# Altium PCB CCP_PCB2.PcbDoc
Units mil, origin at the board's own origin, x right, y up, seen from the top; angles counter-clockwise.
Board outline 5800 x 4575 mil, 2 copper layers (Top Layer, Bottom Layer); 66 components, 54 nets, 270 pads, 27 vias.
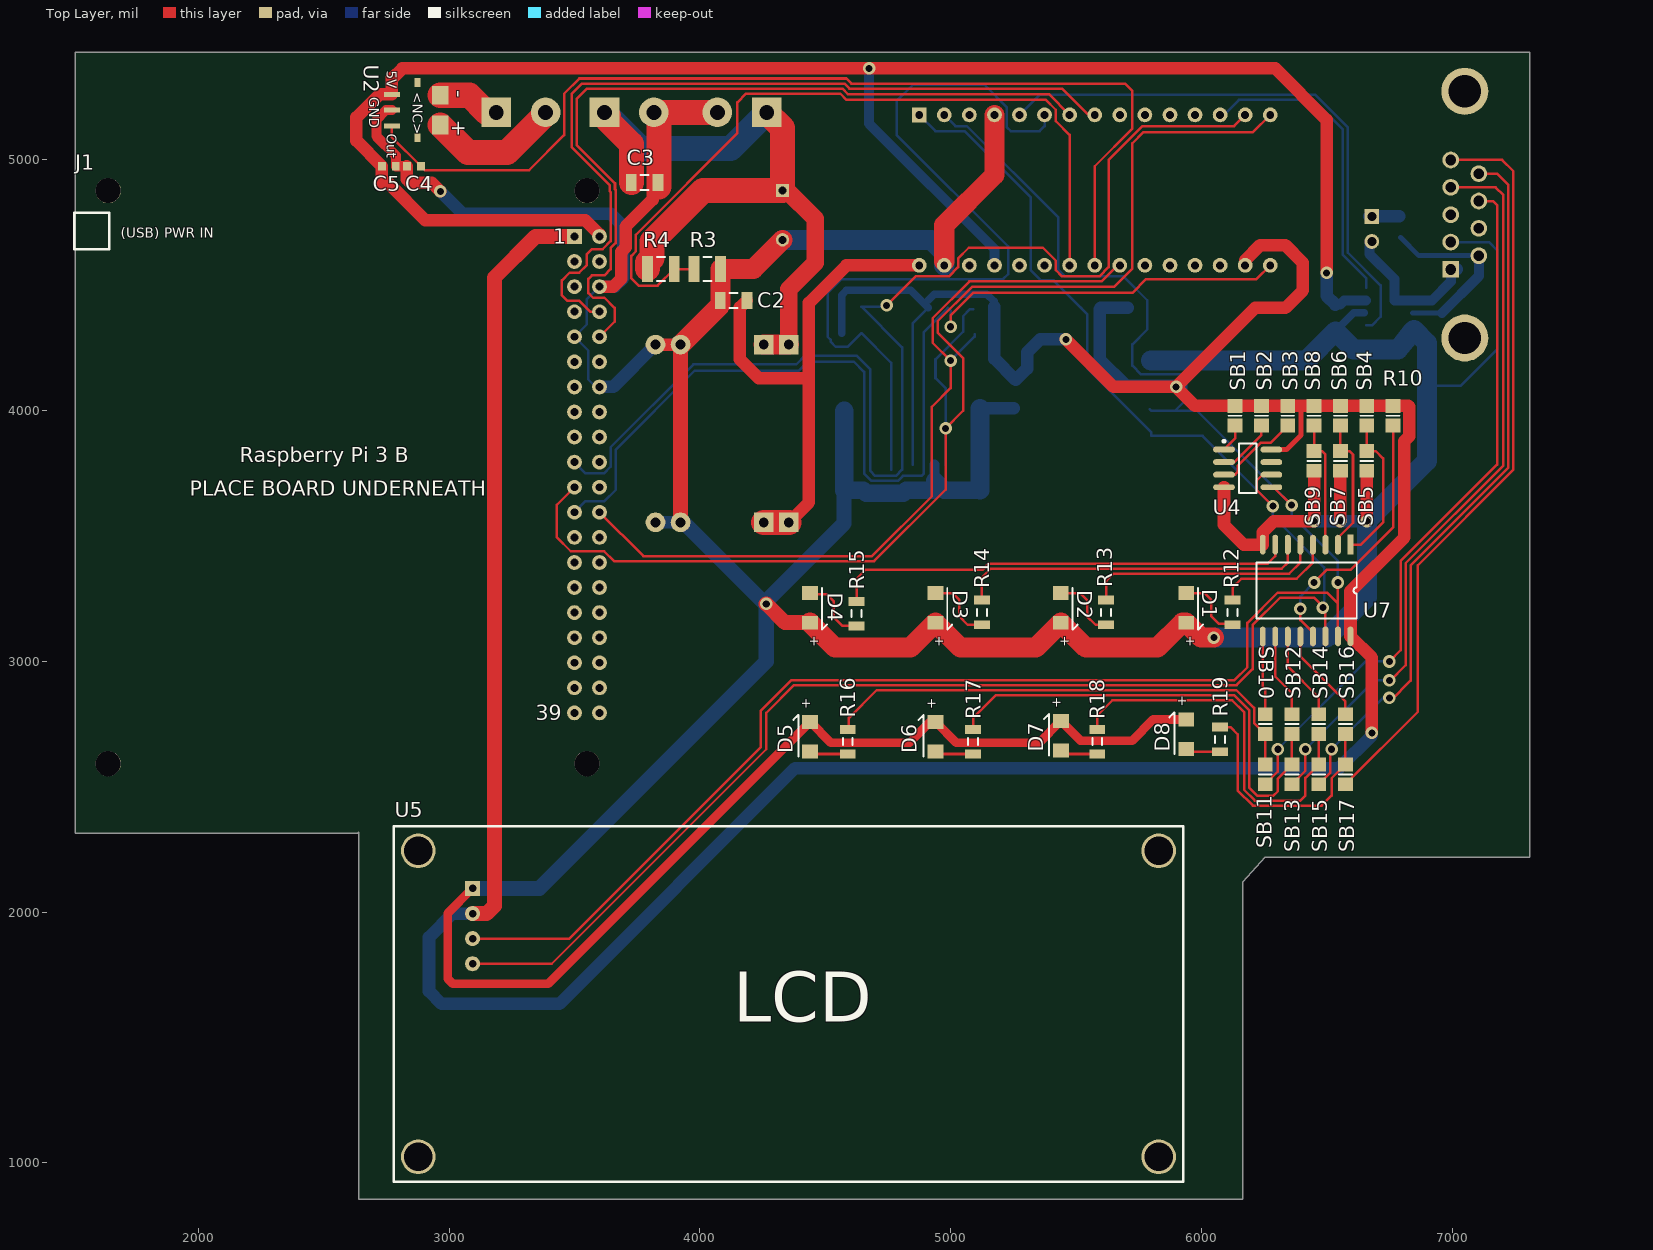
[diagram p0: Top Layer view]
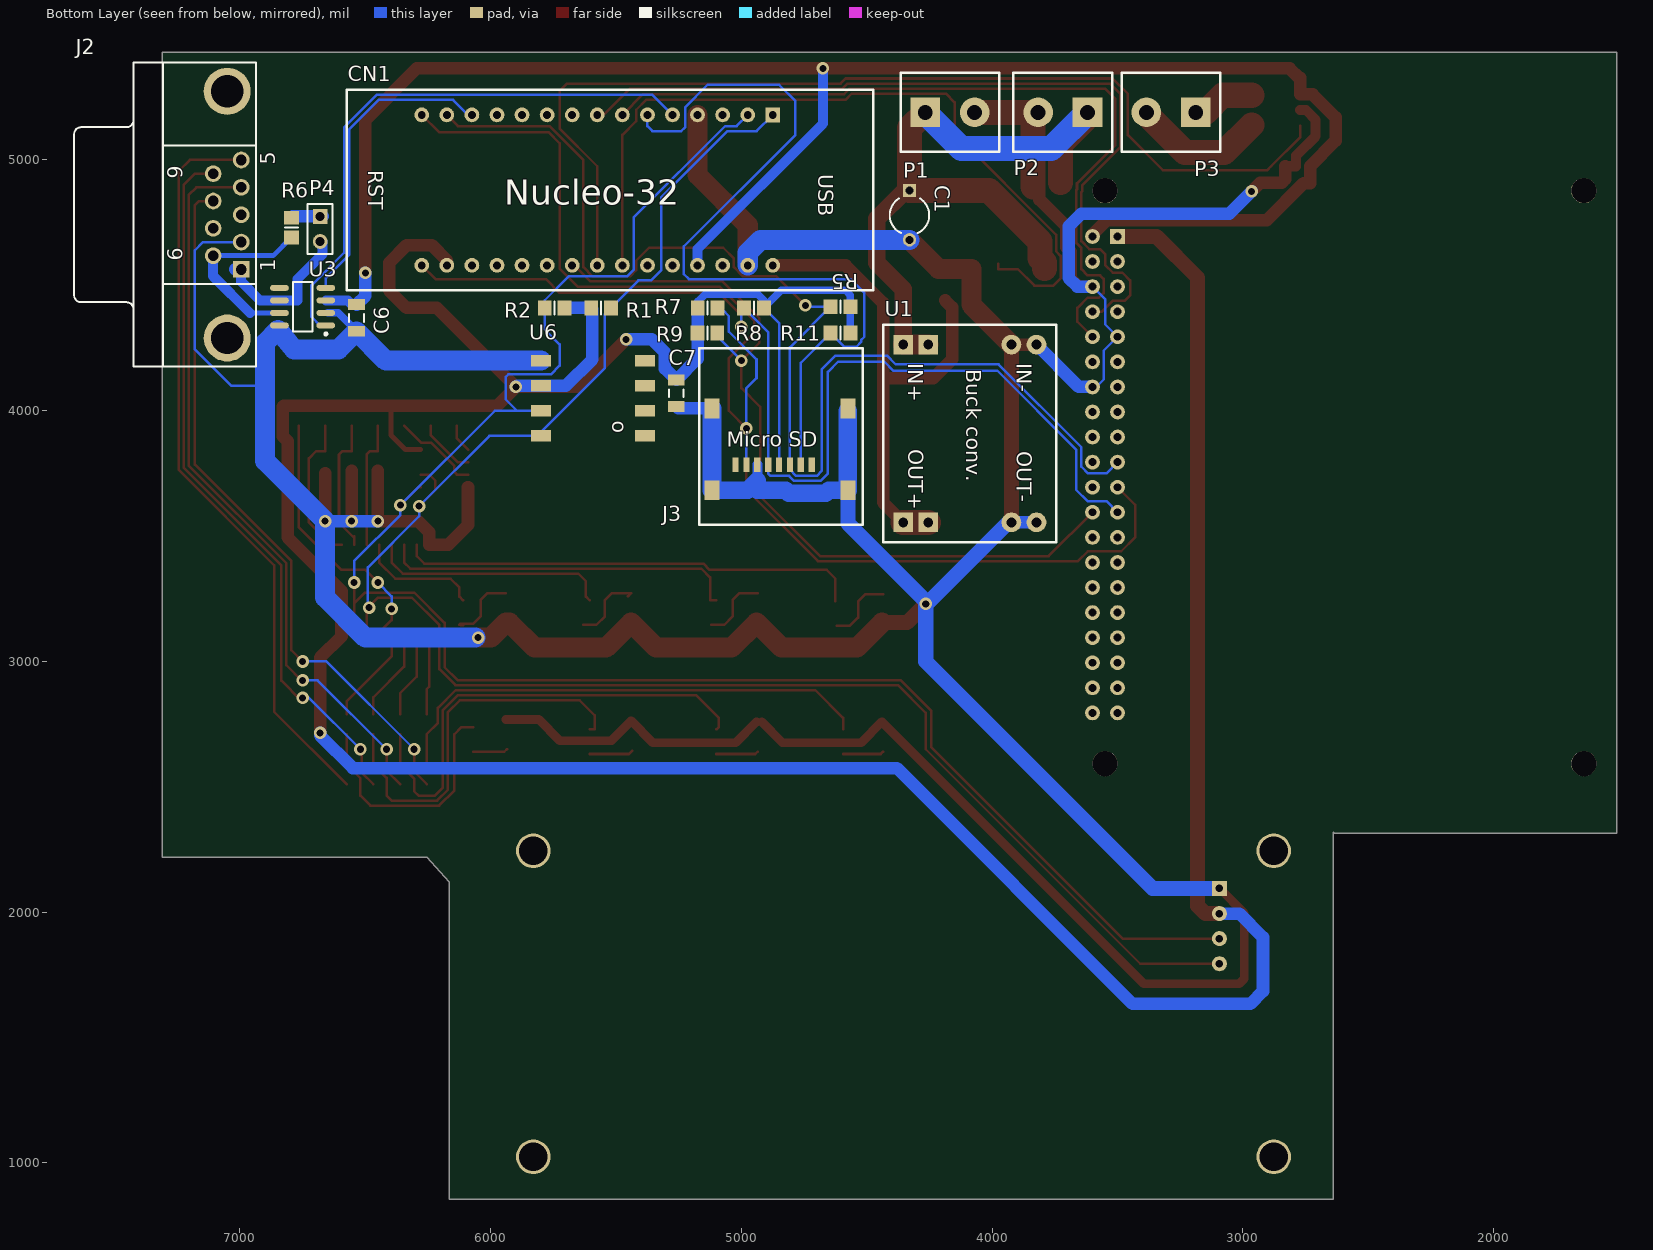
[diagram p1: Bottom Layer view, seen from below]

## Layer stack, top to bottom
Top Solder: solder mask 0.4, Solder Resist, Dk 3.5
Top Layer: signal copper 1.4
Dielectric 1: dielectric 12.6, FR-4, Dk 4.8
Bottom Layer: signal copper 1.4
Bottom Solder: solder mask 0.4, Solder Resist, Dk 3.5

## Board outline
6165,855 6165,2120 6255,2220 7310,2220 7310,5430 1510,5430 1510,2315 2635,2315 2640,2320 2640,855

## Design rules (kind name [scope] priority, off if disabled: settings)
Clearance [All] p1: gap=10 ignorepadtopadclearanceinfootprint=FALSE except(0: Arc-Hole Track-Hole SMDPad-Hole THPad-Hole Via-Hole Fill-Hole Poly-Hole Region-Hole Text-Hole)
PolygonConnect [All] p1: connectstyle=Relief reliefconductorwidth=10 reliefentries=4 polygonreliefangle="90 Angle" airgapwidth=10
RoutingVias [All] p1: holewidth=28 width=50 viastyle="Through Hole" minholewidth=28 minwidth=50 maxholewidth=28 maxwidth=50
SolderMaskExpansion [All] p1: expansion=4
Width [All] p1: maxlimit=200 minlimit=10 preferedwidth=10 minimp=50.000000 maximp=50.000000 favimp=50.000000
30 further rules are at their usual default settings.

## Classes and differential pairs
component class CCP_MCU: C1 C2 C3 C4 C5 C6 CN1 J1 J2 P1 P2 P3 P4 R1 R2 R3 R4 R5 R6 R7 R8 R9 SB1 SB2 SB3 U1 U2 U3 U4
component class CCP_IO: C7 D1 D2 D3 D4 D5 D6 D7 D8 J3 R10 R11 R12 R13 R14 R15 R16 R17 R18 R19 SB4 SB5 SB6 SB7 SB8 SB9 SB10 SB11 SB12 SB13 SB14 SB15 SB16 SB17 U5 U6 U7

## Components (designator, comment, footprint, x,y, rotation, side; value= is the part's Value field where it differs from the comment)
C1 "Cap" CAPR5-4X5 4330,4780 r270 bottom value=220uF
C2 "Cap" C1206 4135,4440 r0 top value=10uF
C3 "Cap" C1206 3780,4910 r180 top value=10uF
C4 "Cap Semi" 1608[0603] 2860,4975 r0 top value=100pF
C5 "Cap Semi" 1608[0603] 2760,4975 r0 top value=.1uF
C6 "Cap" C1206 6535,4370 r90 bottom value=10uF
C7 "Cap" C1206 5260,4070 r90 bottom value=10uF
CN1 "NUCLEO-L432KC" NUCLEO-32 4875,5180 r270 bottom
D1 "LED1" "1206 LED" 5939.63,3213.9 r270 top
D2 "LED1" "1206 LED" 5439.63,3213.9 r270 top
D3 "LED1" "1206 LED" 4939.63,3213.9 r270 top
D4 "LED1" "1206 LED" 4439.63,3213.9 r270 top
D5 "LED1" "1206 LED" 4440,2700 r90 top
D6 "LED1" "1206 LED" 4940,2700 r90 top
D7 "LED1" "1206 LED" 5440,2704.06 r90 top
D8 "LED1" "1206 LED" 5940,2710 r90 top
J1 "Raspberry Pi" "RASPBERRY PI" 3500,4695 r0 top
J2 "D Connector 9" DSUB1.385-2H9 7424.92,4781.89 r90 bottom
J3 "uSD" MICRO_SD_HOLDER 5023.23,3785 r180 bottom
P1 "V_BATT" "2POS TERM BLOCK" 4266.85,5190 r180 bottom
P2 "NAP" "2POS TERM BLOCK" 3620,5190 r0 bottom
P3 "Header 2H" "2POS TERM BLOCK" 3188.15,5190 r0 bottom
P4 "TERM" HDR1X2 6680,4775 r270 bottom
R1 "Res1" 6-0805_M 5560,4410 r0 bottom value=1K
R2 "Res1" 6-0805_M 5745,4410 r180 bottom value=1K
R3 "SMD 1210" 14-1210 4030,4565 r0 top value=1K
R4 "SMD 1210" 14-1210 3845,4565 r0 top value=4.5K
R5 "Res1" 6-0805_M 4605,4415 r0 bottom value=47K
R6 "Res1" 6-0805_M 6795,4730 r270 bottom value=120
R7 "Res1" 6-0805_M 5135,4410 r180 bottom value=47K
R8 "Res1" 6-0805_M 4950,4410 r0 bottom value=47K
R9 "Res1" 6-0805_M 5135.63,4310 r0 bottom value=47K
R10 "Res1" 6-0805_M 6765,3980 r90 top value=10K
R11 "Res1" 6-0805_M 4605,4310 r0 bottom value=10K
R12 "Res1" 1206 6125,3146.57 r90 top value=1K
R13 "Res1" 1206 5620,3146.57 r90 top value=1K
R14 "Res1" 1206 5125,3146.57 r90 top value=1K
R15 "Res1" 1206 4625,3141.57 r90 top value=1K
R16 "Res1" 1206 4590,2631.1 r90 top value=1K
R17 "Res1" 1206 5090,2631.1 r90 top value=1K
R18 "Res1" 1206 5585,2631.1 r90 top value=1K
R19 "Res1" 1206 6075,2640 r90 top value=1K
SB1 "Res1" 6-0805_M 6135,3980 r90 top value=0
SB2 "Res1" 6-0805_M 6240,3980 r90 top value=0
SB3 "Res1" 6-0805_M 6345,3980 r90 top value=0
SB4 "Res1" 6-0805_M 6660,3980 r90 top value=0
SB5 "Res1" 6-0805_M 6660,3800 r90 top value=0
SB6 "Res1" 6-0805_M 6555,3980 r90 top value=0
SB7 "Res1" 6-0805_M 6555,3800 r90 top value=0
SB8 "Res1" 6-0805_M 6450,3980 r90 top value=0
SB9 "Res1" 6-0805_M 6450,3800 r90 top value=0
SB10 "Res1" 6-0805_M 6255,2750 r90 top value=0
SB11 "Res1" 6-0805_M 6255,2550 r90 top value=0
SB12 "Res1" 6-0805_M 6361.67,2750 r90 top value=0
SB13 "Res1" 6-0805_M 6361.67,2550 r90 top value=0
SB14 "Res1" 6-0805_M 6468.33,2750 r90 top value=0
SB15 "Res1" 6-0805_M 6468.33,2550 r90 top value=0
SB16 "Res1" 6-0805_M 6575,2750 r90 top value=0
SB17 "Res1" 6-0805_M 6575,2550 r90 top value=0
U1 "MP1584EN Breakout Board" "MP1584EN Breakout" 3823.5,4263.66 r270 bottom
U2 "ACS780xLR" "7-pin PSOF" 2874.45,5199.06 r270 top
U3 "MCP2561" SO8_L 6750,4415 r0 bottom
U4 "CAT24C32" SO8_N 6185,3770 r0 top
U5 "16x2 Char. LCD" B01LC8HZ2O 2877.24,2245 r0 top
U6 "SSCMNNN030PA2A3" 8-SMT 5385,4200 r270 bottom
U7 "PCF8574" 16-SOIC 6595,3466.14 r270 top

## Footprints (in the part's own frame and the unit in brackets; to place one, negate y for a bottom-side part, rotate by r counter-clockwise, add the part's x,y. Pads: shape width x height; smd on the part's side, far side on the other; paste and mask are expansions set on the pad)
"2POS TERM BLOCK" [mm] "5mm Pitch"
  rect 3x3 hole 1.5: 1(0,0)
  round 3 hole 1.5: 2(5,0)
  silkscreen extent -2.5,-4 7.5,4, body extent -2.51,-4.57 8.09,4.43, height 12.6
6-0805_M [mm] "Chip Resistor, Body 2.0x1.2mm, IPC Low Density"
  rect 1.4x1.5 smd: 1(-1,0) 2(1,0)
  silkscreen extent 0,-0.65 0,0.65, body extent -1.07,-0.7 1.07,0.7, height 0.7
"7-pin PSOF" [mm] "ACS780xLR"
  rect 0.5x1.6 smd: 1(-1.6,-2.6) 2(0,-2.6) 3(1.6,-2.6)
  rect 0.9x0.6 smd: 4(2.8,0) 7(-2.8,0)
  rect 1.9x1.7 smd: 5(1.5,2.3) 6(-1.5,2.3)
8-SMT [mm]
  rect 1.15x2.04 smd: 1(0,-10.54) 2(2.54,-10.54) 3(5.08,-10.54) 4(7.62,-10.54) 5(7.62,0) 6(5.08,0) 7(2.54,0) 8(0,0)
  body extent -1.35,-12 8.55,1.46, height 5.44
14-1210 [mm] "Chip Resistor, Body 3.2x2.5mm, IPC High Density"
  rect 1.1x2.6 smd: 1(-1.35,0) 2(1.35,0)
  silkscreen extent -0.4,-1.2 0.4,1.2, body extent -1.68,-1.32 1.68,1.32, height 0.9
16-SOIC [mm]
  rect 2x0.6 smd: 1(0,0)
  oval 2x0.6 smd: 2(0,-1.27) 3(0,-2.54) 4(0,-3.81) 5(0,-5.08) 6(0,-6.35) 7(0,-7.62) 8(0,-8.89) 9(9.3,-8.89) 10(9.3,-7.62) 11(9.3,-6.35) 12(9.3,-5.08) 13(9.3,-3.81) 14(9.3,-2.54) 15(9.3,-1.27) 16(9.3,0)
  silkscreen extent 1.84,-9.53 7.46,0.64
1206 [mm] "1206 SMD Resistor"
  rect 0.9x1.6 smd: 1(0,0) 2(2.5,0)
  silkscreen extent 0.9,-0.5 1.6,0.5
"1206 LED" [mm]
  rect 1.4x1.6 smd: 1(-1.5,0) 2(1.5,0)
  silkscreen extent -2,1.2 2.2,1.7, body extent -1.4,-0.8 1.5,0.8, height 1
1608[0603] [mm] "Chip Capacitor, Body 1.6x0.8mm, IPC High Density"
  rect 0.8x0.9 smd: 1(-0.7,0) 2(0.7,0)
  body extent -0.87,-0.48 0.87,0.48, height 1.3
B01LC8HZ2O [mm] "LCD 16x2 Characters"
  rect 1.524x1.524 hole 0.762: 1(5.5,-3.81)
  round 1.524 hole 0.762: 2(5.5,-6.36) 3(5.5,-8.9) 4(5.5,-11.44)
  round 3.5 hole 2.9: H(0,-31) H(0,0) H(75,-31) H(75,0)
  silkscreen extent -2.5,-33.5 77.5,2.5
C1206 [mm] "Chip Capacitor, Body 3.2x1.6mm, IPC High Density"
  rect 1.1x1.7 smd: 1(-1.35,0) 2(1.35,0)
  silkscreen extent -0.4,-0.75 0.4,0.75, body extent -1.7,-0.9 1.7,0.9, height 1.3
CAPR5-4X5 [mm] "Capacitor; 2 Leads"
  rect 1.35x1.35 hole 0.8: 1(-2.5,0)
  round 1.35 hole 0.8: 2(2.5,0)
  silkscreen extent -1.69,-2 1.82,2
DSUB1.385-2H9 [mm] "Connector; D Subminiature; 9 Position; Right Angle; Pitch 1.385 mm"
  rect 1.69x1.69 hole 1.09: 1(-5.54,-10.92)
  round 1.69 hole 1.09: 2(-2.77,-10.92) 3(0,-10.92) 4(2.77,-10.92) 5(5.54,-10.92) 6(-4.155,-8.08) 7(-1.385,-8.08) 8(1.385,-8.08) 9(4.155,-8.08)
  round 4.76 hole 3.26: 10(-12.495,-9.5) 11(12.495,-9.5)
  silkscreen extent -15.4,-12.4 15.4,6
HDR1X2 [mm] "Connector; Header; 2 Position"
  rect 1.5x1.5 hole 0.9: 1(0,0)
  round 1.5 hole 0.9: 2(2.54,0)
  silkscreen extent -1.27,-1.27 3.81,1.27
MICRO_SD_HOLDER [mm]
  rect 0.63x1.5 smd: 1(7.7,0) 2(6.6,0) 3(5.5,0) 4(4.4,0) 5(3.3,0) 6(2.2,0) 7(1.1,0) 8(0,0)
  rect 1.5x2 smd: 9(-2.38,-2.6) 9(-2.38,5.7) 9(11.37,-2.6) 9(11.37,5.7)
  silkscreen extent -3.7,-6.1 12.9,11.8
"MP1584EN Breakout" [mm] "Buck Converter"
  round 2 hole 1: 0(0,-2.54) 0(0,0) 2(18,-2.54) 2(18,0)
  rect 2x2 hole 1: 1(0,-13.5) 1(0,-10.96) 3(18,-13.5) 3(18,-10.96)
  silkscreen extent -2,-15.5 20,2
NUCLEO-32 [mm]
  rect 1.5x1.5 hole 0.8: 1(0,0)
  round 1.5 hole 0.8: 2(0,-2.54) 3(0,-5.08) 4(0,-7.62) 5(0,-10.16) 6(0,-12.7) 7(0,-15.24) 8(0,-17.78) 9(0,-20.32) 10(0,-22.86) 11(0,-25.4) 12(0,-27.94) 13(0,-30.48) 14(0,-33.02) 15(0,-35.56) 16(15.24,-35.56) 17(15.24,-33.02) 18(15.24,-30.48) 19(15.24,-27.94) 20(15.24,-25.4) 21(15.24,-22.86) 22(15.24,-20.32) 23(15.24,-17.78) 24(15.24,-15.24) 25(15.24,-12.7) 26(15.24,-10.16) 27(15.24,-7.62) 28(15.24,-5.08) 29(15.24,-2.54) 30(15.24,0)
  silkscreen extent -2.54,-43.18 17.78,10.16, body extent -1.67,-40.6 16.87,9.69, height 5
"RASPBERRY PI" [mm] "2x20 Header with mounting holes"
  rect 1.5x1.5 hole 0.8: 1(0,0)
  round 1.5 hole 0.8: 2(2.54,0) 3(0,-2.54) 4(2.54,-2.54) 5(0,-5.08) 6(2.54,-5.08) 7(0,-7.62) 8(2.54,-7.62) 9(0,-10.16) 10(2.54,-10.16) 11(0,-12.7) 12(2.54,-12.7) 13(0,-15.24) 14(2.54,-15.24) 15(0,-17.78) 16(2.54,-17.78) 17(0,-20.32) 18(2.54,-20.32) 19(0,-22.86) 20(2.54,-22.86) 21(0,-25.4) 22(2.54,-25.4) 23(0,-27.94) 24(2.54,-27.94) 25(0,-30.48) 26(2.54,-30.48) 27(0,-33.02) 28(2.54,-33.02) 29(0,-35.56) 30(2.54,-35.56) 31(0,-38.1) 32(2.54,-38.1) 33(0,-40.64) 34(2.54,-40.64) 35(0,-43.18) 36(2.54,-43.18) 37(0,-45.72) 38(2.54,-45.72) 39(0,-48.26) 40(2.54,-48.26)
  round 2.54 hole 2.54 unplated: H(-47.23,-53.41) H(-47.23,4.64) H(1.27,-53.41) H(1.27,4.64)
  silkscreen extent -50.67,-1.27 -47.12,2.41
SO8_L [mm] "SOIC, 8-Leads, Body 4.9x3.9mm, Pitch 1.27mm, IPC High Density"
  oval 1.9x0.6 smd: 1(-2.35,1.905) 2(-2.35,0.635) 3(-2.35,-0.635) 4(-2.35,-1.905) 5(2.35,-1.905) 6(2.35,-0.635) 7(2.35,0.635) 8(2.35,1.905)
  silkscreen extent -2.47,-2.5 1,2.88, body extent -2,-2.5 2,2.5, height 1.75
SO8_N [mm] "SOIC, 8-Leads, Body 4.9x3.9mm, Pitch 1.27mm, IPC Medium Density"
  oval 2.2x0.6 smd: 1(-2.4,1.905) 2(-2.4,0.635) 3(-2.4,-0.635) 4(-2.4,-1.905) 5(2.4,-1.905) 6(2.4,-0.635) 7(2.4,0.635) 8(2.4,1.905)
  silkscreen extent -2.52,-2.5 0.9,2.88, body extent -2,-2.5 2,2.5, height 1.75

## Part data
C1 C2 C3 C6 C7: "Capacitor", LatestRevisionDate=17-Jul-2002, LatestRevisionNote="Re-released for DXP Platform.", PackageDescription="Radial Cap, Thru-Hole; 2 Leads; 0.3 in Pin Spacing", PackageReference=RAD-0.3, Published=8-Jun-2000, Publisher="Altium Limited"
C4 C5: "Capacitor (Semiconductor SIM Model)", LatestRevisionDate=29-May-2009, LatestRevisionNote="IPC-7351 Footprint Added.", PackageDescription="Chip Capacitor", PackageReference=C1206, Published=8-Jun-2000, Publisher="Altium Limited"
CN1: "STM32L432KC Development Board", ComponentLink1Description=MBED, ComponentLink1URL=https://os.mbed.com/platforms/ST-Nucleo-L432KC/, ComponentLink2Description=Digikey, ComponentLink2URL=https://www.digikey.com/products/en?keywords=NUCLEO-L432KC
D1 D2 D3 D4 D5 D6 D7 D8: "Typical RED GaAs LED", LatestRevisionDate=08-Jul-2005, LatestRevisionNote="Mech Layer 1 removed.", PackageDescription="LED; 2 Leads", PackageReference=LED-1, Published=8-Jun-2000, Publisher="Altium Limited"
J1: "2x20 Header"
J2: "Receptacle Assembly, 9 Position, Right Angle", PackageDocument=O, DatasheetDocument=1-Sep-1999, Gender=Receptacle, LatestRevisionDate=17-Jul-2002, LatestRevisionNote="Re-released for DXP Platform.", Orientation="Right Angle", PackageReference=788750, Positions=9, Published=15-Jun-2001, Publisher="Altium Limited"
J3: library part "SD Card"
P1 P2 P4: library part "Header 2", "Header, 2-Pin", LatestRevisionDate=17-Jul-2002, LatestRevisionNote="Re-released for DXP Platform.", Publisher="Altium Limited"
P3: "Header, 2-Pin, Right Angle", LatestRevisionDate=17-Jul-2002, LatestRevisionNote="Re-released for DXP Platform.", Publisher="Altium Limited"
R1 R2 R5 R6 R7 R8 R9 R10 R11 R12 R13 R14 R15 R16 R17 R18 R19 SB1 SB2 SB3 SB4 SB5 SB6 SB7 SB8 SB9 SB10 SB11 SB12 SB13 SB14 SB15 SB16 SB17: "Resistor", LatestRevisionDate=17-Jul-2002, LatestRevisionNote="Re-released for DXP Platform.", PackageDescription="Axial Device, Thru-Hole; 2 Leads; 0.3 in Pin Spacing", PackageReference=AXIAL-0.3, Published=8-Jun-2000, Publisher="Altium Limited"
R3 R4: library part Res1, "Resistor", LatestRevisionDate=17-Jul-2002, LatestRevisionNote="Re-released for DXP Platform.", PackageDescription="Axial Device, Thru-Hole; 2 Leads; 0.3 in Pin Spacing", PackageReference=AXIAL-0.3, Published=8-Jun-2000, Publisher="Altium Limited"
U1: "Buck Converter", ComponentLink1Description=Part, ComponentLink1URL=https://www.amazon.com/eBoot-MP1584EN-Converter-Adjustable-Module/dp/B01MQGMOKI/
U2: "Hall-Effect Current Sensor", ComponentLink1Description=Part, ComponentLink1URL=https://www.digikey.com/product-detail/en/allegro-microsystems-llc/ACS780LLRTR-050B-T/620-1817-1-ND/6189106
U3: "CAN Transciever", ComponentLink1Description=Part, ComponentLink1URL=https://www.digikey.com/product-detail/en/microchip-technology/MCP2561-E-SN/MCP2561-E-SN-ND/4079961, ComponentLink2Description=Datasheet, ComponentLink2URL=http://ww1.microchip.com/downloads/en/DeviceDoc/20005167C.pdf
U4: "I2C EEPROM", ComponentLink1Description=Part, ComponentLink1URL=https://www.digikey.com/product-detail/en/on-semiconductor/CAT24C32WI-GT3/CAT24C32WI-GT3CT-ND/1631159, ComponentLink2Description=Datasheet, ComponentLink2URL=http://www.onsemi.com/pub/Collateral/CAT24C32-D.PDF
U5: library part B01LC8HZ2O, "LCD 16x2 Character", ComponentLink1Description=Part, ComponentLink1URL=https://www.amazon.in/Industry-Interface-Display-Character-MEGA2560/dp/B01LC8HZ2O
U6: "Honeywell Digital Pressure Sensor", ComponentLink1Description=Part, ComponentLink1URL=https://www.digikey.com/product-detail/en/honeywell-sensing-and-productivity-solutions/SSCMNNN030PA2A3/480-6407-ND/2416123, ComponentLink2Description=Datasheet, ComponentLink2URL=https://sensing.honeywell.com/index.php?ci_id=151134
U7: "I2C I/O Expander", ComponentLink1Description=Part, ComponentLink1URL=https://www.digikey.com/product-detail/en/texas-instruments/PCF8574DWR/296-13108-1-ND/484579, ComponentLink2Description=Datasheet, ComponentLink2URL=http://www.ti.com/lit/ds/symlink/pcf8574.pdf

## Via types
v1: diameter 50, hole 28, Top Layer to Bottom Layer, 27 vias

## Nets (pads, with @x,y where several pads share a name; then routed paths per layer and width w, separated by ;. In a path a pad name is that pad's centre, name@x,y a point inside that pad or via, vN(x,y) a via of type N, cw(c..) or ccw(c..) an arc to the next point about the centre after c; other vN are vias at no path point)
CAN1_H: J2.6 R6.2 U3.7 | length 748.4
  Bottom Layer w20: R6.2 6867.32,4618.31 J2.6 ; U3.7 6960,4390
  Bottom Layer w40: 6960,4390 7106.81,4536.81 J2.6
CAN1_L: J2.1 P4.2 U3.6 | length 605
  Bottom Layer w40: P4.2@6670,4675 6670,4625 6770.12,4524.88 6770.12,4440 U3.6 6920,4440 6995,4515 J2.1
  Bottom Layer w50: J2.1 J2.1@7018.78,4563.78
CAN1_RX: CN1.13 U3.4 | length 1233.9
  Bottom Layer w10: CN1.13 6090,5180 6150,5240 6446.72,5240 6565,5121.72 6565,4621.72 6657.48,4529.24 U3.4
CAN1_TX: CN1.5 U3.1 | length 2277.8
  Bottom Layer w10: CN1.5 5355,5260 6455,5260 6585,5130 6585,4630 6715,4500 6715,4375 6680,4340 U3.1
CURR_SENSE: C4.2 CN1.23 U2.3 | length 4078.2
  Top Layer w10: U2.3 2772.09,5090.47 C4.2 2902.56,4960 3320,4960 3459.06,5099.06 3459.06,5264.06 3520,5325 4584.85,5325 4604.85,5305 5695,5305 5725,5275 5725,5125 5575,4975 CN1.23
GND: C1.2 C2.1 C3.1 C4.1 C5.2 C6.1 C7.1 CN1.4 CN1.29 D1.2 D2.2 D3.2 D4.2 D5.2 D6.2 D7.2 D8.2 J1.6 J1.9 J1.14 J2.2 J3.6 J3.9 P1.2 P2.2 R3.2 SB5.1 SB7.1 SB9.1 U1.0 U1.2 U2.2 U3.2 U3.8 U4.4 U5.1 U6.1 U7.8 | length 22384.1
  Top Layer w10: D6.2@4919.06,2759.06 D6.2 ; D1.2@5924.84,3154.84 D1.2
  Top Layer w35: U5.1 2995,1996.22 2995,1735 3015,1715 3395.94,1715 D5.2 4522.74,2676.32 4836.32,2676.32 D6.2@4919.06,2759.06 ; D6.2 5022.74,2676.32 5353.21,2676.32 D7.2 5518.8,2684.31 5724.31,2684.31 5809.06,2769.06 D8.2
  Top Layer w40: U2.2 2749.06,5199.06 2710,5160 2710,5095 2787.56,5017.44 C5.2 C4.1
  Top Layer w50: C4.1@2831.72,4974.27 2831.72,4923.28 2845,4910 2930,4910 v1(2965,4875) ; J1.6 3655,4495 3686.85,4526.85 3686.85,4634.03 3704.53,4651.7 3704.53,4734.53 3811.85,4841.85 3811.85,4888.7 C3.1 ; U1.0@3823.5,4263.66 U1.0@3923.5,4263.66 ; U4.4 6090.51,3544.49 6168.86,3466.14 U7.8 6245,3515 6290,3560 v1(6450,3560) SB9.1 ; v1(6555,3560) SB7.1 ; v1@6660,3565 SB5.1@6660,3750.63
  Top Layer w60: U1.2@3923.5,3555 U1.0@3923.5,4263.66 ; v1(4265,3230) 4340.16,3154.84 D4.2
  Top Layer w80: U1.0@3923.5,4263.66 4083.15,4423.31 R3.2 4213.43,4565 C1.2 ; D4.2 4539.47,3055 4839.79,3055 D3.2 5039.47,3055 5339.79,3055 D2.2 5539.47,3055 5825,3055 D1.2@5924.84,3154.84 ; CN1.29@4975,4594.81 4975,4740 5175,4940 CN1.4 ; D1.2 5999.47,3095 v1(6050,3095)
  Top Layer w100: P2.2 P2.2@3825,5190 ; C3.1@3836.85,4893.15 3836.85,5178.15 P2.2@3825,5190 ; P1.2 P2.2@3825,5190
  Bottom Layer w10: J1.14 3585,4095 3555,4125 3555,4240 J1.9 3550,4345 3550,4445 J1.6 ; 4936.61,3721.61 4936.61,3722.74 ; C7.1@5252.56,4009.41 C7.1 ; U3.8 6847.52,4322.52 ; 6900,4095 6905,4100 7035,4100 7180,4245 7180,4640 7147.17,4672.83 J2.2
  Bottom Layer w30: C6.1 6608.15,4390 U3.2@6650,4390
  Bottom Layer w40: 4936.61,3722.74 J3.6
  Bottom Layer w50: v1(2965,4875) 3055,4785 3645,4785 3695,4735 3695,4530 3660,4495 J1.6 ; J1.14 3654.84,4095 U1.0@3823.5,4263.66 ; U1.2@3823.5,3555 U1.2@3923.5,3555 ; J3.9@5116.93,4009.41 C7.1@5252.56,4009.41 ; v1(6450,3560) v1(6555,3560) v1(6660,3560)
  Bottom Layer w60: U5.1 3360,2095 4265,3000 v1(4265,3230) 4260,3235 4575.59,3550.59 J3.9@4575.59,3682.64 ; U1.2@3923.5,3555 3935,3555 v1@4260,3230
  Bottom Layer w70: J3.9@4575.59,3682.64 4576.18,3682.64 4651.65,3682.64 4663.82,3670.47 4811,3670.47 4823.16,3682.64 4936.61,3682.64 4936.61,3721.61 4975.59,3682.64 J3.9@5116.93,3682.64
  Bottom Layer w75: J3.9@4576.18,3682.64 J3.9@4576.18,3998.82 ; J3.9@5116.93,3682.64 J3.9@5116.93,4009.41
  Bottom Layer w80: C1.2 4923.43,4681.57 4975,4630 CN1.29 ; U6.1 6418.15,4200 C6.1 6606.85,4245 6785,4245 6842.54,4316.34 6847.52,4322.52 6900,4270 6900,4095 6900,3800 v1(6660,3560) 6660,3255 6500,3095 v1@6060,3095
I2C1_SCL: CN1.1 R1.1 U4.6 U5.4 U6.4 U7.14 | length 7358.9
  Top Layer w10: U5.4 3409.61,1794.61 4265,2650 4265,2795 4375.63,2905.63 6140.63,2905.63 6205,2970 6205,3145 6315,3255 6450,3255 v1@6479.14,3225.86 ; U4.6 6245,3745 6221.18,3721.18 6221.18,3683.82 v1(6285,3620) ; v1(6485,3215) 6495,3205 U7.14
  Bottom Layer w10: CN1.1 4939.53,5115.47 5056.24,5115.47 5319.53,4852.19 5319.53,4560.47 5360,4520 5410.63,4520 R1.1 5545,4385.63 5545,4170 5799.96,3915.04 U6.4 6005,3900 v1(6285,3620) 6285,3580 6490,3375 6490,3220 v1(6485,3215)
I2C1_SDA: CN1.2 R2.1 U4.5 U5.3 U6.3 U7.15 | length 7572.7
  Top Layer w10: U5.3 3479.61,1894.61 4243.79,2658.79 4243.79,2803.79 4365.63,2925.63 6132.35,2925.63 6183.79,2977.07 6183.79,3153.79 6305,3275 6501.57,3275 6545,3231.57 ; U4.5 6288.28,3695 v1(6360,3623.28) ; U7.15 6545,3231.57 ; v1(6545,3315) 6545,3231.57
  Bottom Layer w10: CN1.2 5019.53,5135.47 5064.53,5135.47 5430,4770 5430,4565 5430.47,4564.53 5430.47,4561.56 5456.56,4535.47 5689.53,4535.47 5784.37,4440.63 R2.1 5784.37,4324.37 5725,4265 5725,4180 5760,4145 5930,4145 5940,4135 5940,4045 5895,4000 ; U6.3@5794.96,4005 U6.3 5895,4000 ; v1(6545,3315) 6545,3400 6360,3585 v1(6360,3623.28) 5983.28,4000 5895,4000
IO_A0: SB4.1 SB5.2 U7.1 | length 600.2
  Top Layer w10: U7.1 6636.14,3466.14 6725,3555 6725,3810 6695.63,3839.37 SB5.2 SB4.1
IO_A1: SB6.1 SB7.2 U7.2 | length 547.5
  Top Layer w10: U7.2 U7.2@6545,3493.43 ; U7.2@6545,3500 U7.2@6545,3493.43 ; SB6.1 SB7.2 6590.63,3839.37 6605,3825 6605,3553.43 U7.2@6545,3493.43
IO_A2: SB8.1 SB9.2 U7.3 | length 511.1
  Top Layer w10: SB8.1 SB9.2 6480.63,3839.37 6495,3825 U7.3
LED0: R12.2 U7.4 | length 490.4
  Top Layer w10: R12.2@6110,3243.43 6125,3258.43 6125,3295 6160,3330 6380,3330 6445,3395 U7.4
LED1: R13.2 U7.5 | length 960
  Top Layer w10: R13.2@5605,3243.43 5620,3258.43 5620,3320 5650,3350 6350,3350 6395,3395 U7.5
LED2: R14.2 U7.6 | length 1431.6
  Top Layer w10: R14.2@5100,3243.43 5123.43,3243.43 R14.2 5125,3335 5160,3370 6320,3370 6345,3395 U7.6
LED3: R15.2 U7.7 | length 1843.4
  Top Layer w10: R15.2 4625,3330 4660,3365 5126.72,3365 5151.72,3390 6265,3390 6295,3420 U7.7
LED4_I2C: SB10.2 U7.9 | length 314.8
  Top Layer w10: U7.9 6245,2900 6255,2890 SB10.2
LED4_IN: J2.8 SB11.1 | length 2828.2
  Top Layer w10: SB11.1 6255,2510.99 6305,2560.99 v1(6305,2650) ; v1(6750,3000) 6795,3045 6795,3400 7180,3785 7180,4820 7163.58,4836.42 J2.8
  Bottom Layer w10: v1(6305,2650) 6655,3000 v1(6750,3000)
LED5_I2C: SB12.2 U7.10 | length 338.2
  Top Layer w10: U7.10 6295,2940 6361.67,2873.33 SB12.2
LED5_IN: J2.4 SB13.1 | length 2976.7
  Top Layer w10: SB13.1 6361.67,2511.07 6415,2564.4 v1(6415,2650) ; v1(6750,2925) 6750,2920 6815,2985 6815,3391.72 7205,3781.72 7205,4860 7174.06,4890.94 J2.4
  Bottom Layer w10: v1(6415,2650) 6690,2925 v1(6750,2925) v1@6760,2925
LED6_I2C: SB14.2 U7.11 | length 361.7
  Top Layer w10: U7.11 6345,2980 6468.33,2856.67 SB14.2
LED6_IN: J2.9 SB15.1 | length 2874.5
  Top Layer w10: SB15.1 6468.33,2510.99 6515,2557.65 6515,2645 v1(6520,2650) ; v1(6750,2855) 6750,2851.57 6756.57,2845 6835,2923.43 6835,3383.43 6855,3403.43 7225,3773.43 7225,4900 7179.53,4945.47 J2.9
  Bottom Layer w10: v1(6520,2650) 6725,2855 v1(6750,2855)
LED7_I2C: SB16.2 U7.12 | length 385.2
  Top Layer w10: U7.12 6395,3020 6575,2840 SB16.2
LED7_IN: J2.5 SB17.1 | length 2990.5
  Top Layer w10: SB17.1 6863.28,2798.91 6863.28,3383.43 7245,3765.15 7245,4955 7200,5000 J2.5
LV_BATT+: C1.1 C3.2 P1.1 P2.1 R4.1 U1.1 | length 2972.6
  Top Layer w10: R4.1 R4.1@3791.85,4566.85
  Top Layer w70: C1.1 4346.57,4878.43 4460,4765 4460,4590 4355,4485 U1.1@4355,4263.66
  Top Layer w80: U1.1@4255,4263.66 U1.1@4355,4263.66
  Top Layer w100: P2.1 3635,5175 3635,5155 3726.85,5063.15 C3.2 ; R4.1@3791.85,4566.85 3791.85,4590.53 3809.53,4608.21 3809.53,4674.53 4013.43,4878.43 C1.1 4330,5126.85 P1.1
  Bottom Layer w100: P2.1 3765,5045 4121.85,5045 P1.1
NetD1_1: D1.1 R12.1 | length 285.8
  Top Layer w10: D1.1 6012.05,3272.95 6040,3245 6040,3180 6070,3150 6121.57,3150 R12.1 ; R12.1@6110,3145 R12.1@6120,3145
NetD2_1: D2.1 R13.1 | length 294.1
  Top Layer w10: D2.1 D2.1@5452.58,3260 ; D2.1@5444.63,3272.95 5517.05,3272.95 5545,3245 5545,3180 5578.43,3146.57 R13.1@5630,3146.57
NetD3_1: D3.1 R14.1 | length 275.8
  Top Layer w10: D3.1@4934.63,3272.95 5007.05,3272.95 5035,3245 5035,3180 5068.43,3146.57 R14.1@5120,3146.57
NetD4_1: D4.1 R15.1 | length 275.8
  Top Layer w10: D4.1@4434.63,3267.95 4507.05,3267.95 4535,3240 4535,3175 4568.43,3141.57 R15.1@4620,3141.57
NetD5_1: D5.1 R16.1 | length 164.1
  Top Layer w10: D5.1@4435,2640.94 4444.84,2631.1 4585,2631.1 R16.1@4595,2631.1
NetD6_1: D6.1 R17.1 | length 169.1
  Top Layer w10: D6.1@4935,2640.94 4944.84,2631.1 5085,2631.1 R17.1@5100,2631.1
NetD7_1: D7.1 R18.1 | length 175.8
  Top Layer w10: D7.1@5435,2645 5448.9,2631.1 5580,2631.1 R18.1@5605,2631.1
NetD8_1: D8.1 R19.1 | length 139.5
  Top Layer w10: D8.1@5935,2650.94 5945.94,2640 R19.1@6070,2640
NetP4_1: P4.1 R6.1 | length 127.3
  Bottom Layer w10: R6.1@6789.37,4775 R6.1
  Bottom Layer w50: P4.1@6670,4775 R6.1@6789.37,4775
NetR10_1: R10.1 U7.13 | length 1080.2
  Top Layer w10: v1(6395,3210) 6395,3165.48 6445,3115.48 U7.13 ; v1(6450,3315) 6500,3365 6595,3365 6765,3535 R10.1
  Bottom Layer w10: v1(6395,3210) 6395,3260 v1(6450,3315) v1@6450,3305
NetR16_2: R16.2 SB10.1 SB11.2 | length 1979.8
  Top Layer w10: R16.2@4595,2729.53 4595,2775 4705.63,2885.63 6139.37,2885.63 6210.47,2814.53 6210.47,2755.16 SB10.1 SB11.2
NetR17_2: R17.2 SB12.1 SB13.2 | length 1907.8
  Top Layer w10: R17.2@5100,2729.53 5090,2739.53 5090,2775 5180,2865 6131.72,2865 6190.47,2806.24 6190.47,2496.86 6222.33,2465 6287.67,2465 6305.28,2482.61 6305.28,2532.98 SB13.2 SB12.1
NetR18_2: R18.2 SB14.1 SB15.2 | length 1553.3
  Top Layer w10: R18.2@5605,2729.53 R18.2 5585,2785 5645,2845 6123.43,2845 6170.47,2797.96 6170.47,2488.57 6214.05,2445 6395,2445 6415,2465 6415,2536.04 SB15.2 SB14.1
NetR19_2: R19.2 SB16.1 SB17.2 | length 996.2
  Top Layer w10: R19.2@6070,2738.43 R19.2 6116.57,2738.43 6145,2710 6145,2485.76 6205.76,2425 6480,2425 6520,2465 6520,2534.37 SB17.2 SB16.1
NetSB1_1: SB1.1 U4.1 | length 114.1
  Top Layer w10: U4.1 6135,3889.49 SB1.1
NetSB2_1: SB2.1 U4.2 | length 231.7
  Top Layer w10: U4.2 6131.79,3795 6240,3903.21 SB2.1
NetSB3_1: SB3.1 U4.3 | length 350.1
  Top Layer w10: U4.3 6135,3745 6145,3755 6145,3779.92 6236.89,3871.81 6276.18,3871.81 SB3.1
POS3V3: C7.2 CN1.17 J1.1 J3.4 R1.2 R2.2 R5.1 R7.1 R8.1 R9.2 R10.2 R11.1 SB1.2 SB2.2 SB3.2 SB4.2 SB6.2 SB8.2 U4.8 U5.2 U6.2 U7.16 | length 14721
  Top Layer w20: U4.8 6340,3845 6397.5,3902.5 6397.5,4019.37
  Top Layer w50: v1(5460,4285) 5650,4095 v1(5900,4095) ; CN1.17 6175,4600 6235,4660 6335,4660 6405,4590 6405,4480 6335,4410 6215,4410 v1(5900,4095) ; v1(6680,2715) 6680,3015 U7.16 6595,3280.15 6810,3495.15 6810,3879.05 6829.53,3898.57 6829.53,4016.05 6826.21,4019.37 R10.2 SB4.2 SB6.2 SB8.2 6397.5,4019.37 SB3.2 SB2.2 SB1.2 5975.63,4019.37 v1(5900,4095)
  Top Layer w60: U5.2 3150,1994.61 3180.39,2025 3180.39,4530.39 3344.53,4694.53 J1.1@3500,4694.53
  Bottom Layer w10: J3.4 4850,4349.37 R8.1 4910.63,4440.63 ; R9.2@5174.37,4310.63 R9.2
  Bottom Layer w30: R11.1 R5.1 4565.63,4460.63 4585,4480 4840.63,4480 R8.1 ; 4910.63,4440.63 4935,4465 5145,4465 5174.37,4435.63 R7.1@5174.37,4415
  Bottom Layer w50: U5.2 3014.61,1994.61 2920,1900 2920,1685 2970,1635 3440,1635 4380,2575 6550,2575 6680,2705 v1(6680,2715) ; R9.2@5174.37,4310.63 R7.1 R7.1@5174.37,4415 ; R9.2 5175,4208.15 C7.2 5305,4168.15 5305,4232.29 5357.71,4285 v1(5460,4285) ; R2.2 R1.2 5595,4405.63 5595,4205 5700,4100 U6.2 5895,4100 v1(5900,4095)
POS5V: C5.1 C6.2 CN1.27 J1.2 U2.1 U3.3 | length 7207.3
  Top Layer w50: J1.2 3600,4703.55 3544.03,4759.53 2905.47,4759.53 2757.56,4907.44 2732.44,4907.44 C5.1 2630,5077.44 2630,5170 2722.05,5262.05 U2.1 2772.09,5327.09 2775.52,5327.09 2813.43,5365 v1(4675,5365) 6295,5365 6500,5160 v1@6500,4555
  Bottom Layer w40: v1(4675,5365) 4675,5145 5175,4645 CN1.27 ; C6.2 6553.15,4423.15 6570,4440 U3.3
  Bottom Layer w50: v1(6500,4550) 6500,4458.15 C6.2
SD_CS: CN1.6 J3.2 R11.2 | length 3366.4
  Bottom Layer w10: J3.2@4763.39,3765.16 J3.2 4763.39,4190.98 R11.2 4589.37,4255 4542.33,4255 4523.07,4274.26 4523.07,4281.93 4510,4295 4510,4470 4565,4525 5210,4525 5230,4545 5230,4655 4785,5100 4785,5235 4850,5300 5135,5300 5225,5210 5225,5130 5240,5115 5355,5115 5375,5135 CN1.6
SPI3_MISO: CN1.15 J1.21 J3.7 R7.2 | length 5345.5
  Top Layer w10: J1.21 3430,3625 3430,3495 3485.47,3439.53 3618.44,3439.53 3657.97,3400 4695,3400 4980,3685 v1(4980,3930) 5050,4000 5050,4210 4948.76,4311.24 4948.76,4357.04 5087.19,4495.47 5653.44,4495.47 5725,4567.03 5725,5066.72 5768.28,5110 6205,5110 CN1.15
  Bottom Layer w10: J3.7 4979.92,4090.08 4940,4130 4940,4205 5050,4315 5050,4376.93 5078.07,4405 R7.2@5090.63,4405
SPI3_MOSI: CN1.14 J1.19 J3.3 R5.2 | length 4969.6
  Top Layer w10: v1(4745,4420) 4860.47,4535.47 4993.44,4535.47 5030.47,4572.5 5030.47,4607.97 5072.5,4650 5367.97,4650 5419.53,4598.44 5419.53,4560.47 5444.53,4535.47 5593.44,4535.47 5630.47,4572.5 5630.47,5000.47 5765.47,5135.47 6130.47,5135.47 CN1.14
  Bottom Layer w10: J1.19@3495,3795 J1.19 3544.53,3750.47 3618.44,3750.47 3644.53,3776.56 3644.53,3854.53 3974.75,4184.75 4384.75,4184.75 4420,4220 4625,4220 4680,4165 4680,3760 4699.53,3740.47 4782,3740.47 4806.69,3765.16 J3.3 4806.69,4252.68 R5.2 4740,4415 v1(4745,4420)
SPI3_SCLK: CN1.16 J1.23 J3.5 R8.2 | length 4363.8
  Top Layer w10: v1(5000,4335) 5000,4380 5090,4470 5725,4470 5780,4525 6220,4525 CN1.16
  Bottom Layer w10: J1.23 3544.53,3639.53 3619.53,3639.53 3665,3685 3665,3845 3980,4160 4395,4160 4430.25,4195.25 4614.75,4195.25 4655.25,4154.75 4655.25,3749.75 4684.53,3720.47 4790.28,3720.47 4810.28,3740.47 4883.64,3740.47 4893.31,3750.14 J3.5 4893.31,4313.94 R8.2 5000,4399.37 v1(5000,4335)
SPI3_SSEL: CN1.22 J1.24 R9.1 | length 3245.6
  Top Layer w10: J1.24 3775,3420 4686.72,3420 4925,3658.28 4925,4015 5000,4090 v1(5000,4200) 4928.76,4271.24 4928.76,4368.76 5075.47,4515.47 5601.73,4515.47 5666.26,4580 CN1.22
  Bottom Layer w10: v1(5000,4200) 5095.63,4295.63 R9.1@5095.63,4305
UART1_RX: CN1.7 J1.10 | length 3208
  Top Layer w10: J1.10 3660,4355 3660,4410 3619.53,4450.47 3574.53,4450.47 3555.47,4469.53 3555.47,4525.47 3569.53,4539.53 3619.53,4539.53 3644.53,4564.53 3644.53,4648.27 3664.53,4668.27 3664.53,4880.4 3661.85,4883.08 3661.85,4906.58 3510,5058.43 3510,5245 3550,5285 4568.28,5285 4590.19,5263.1 5391.9,5263.1 CN1.7
UART1_TX: CN1.8 J1.8 | length 3327.3
  Top Layer w10: J1.8 3562.97,4395 3518.44,4439.53 3470.47,4439.53 3450,4460 3450,4520 3480.47,4550.47 3518.44,4550.47 3550,4582.03 3550,4625 3570,4645 3612.97,4645 3644.53,4676.56 3644.53,4872.11 3641.85,4874.79 3641.85,4898.3 3490,5050.15 3490,5265 3530,5305 4576.57,5305 4596.57,5285 5445,5285 5550,5180 CN1.8
VBAT+: P3.2 U2.5 | length 535.4
  Top Layer w100: U2.5 3075,5030 3231.11,5030 3385,5183.89 P3.2
VBAT-: P3.1 U2.6 | length 251.4
  Top Layer w10: P3.1@3150,5190 P3.1
  Top Layer w100: U2.6 3081.89,5258.11 P3.1@3150,5190
VIn: C2.2 CN1.30 U1.3 | length 2063
  Top Layer w50: C2.2 4160,4411.85 4160,4205 4235,4130 4435,4130 ; U1.3@4355,3555 4435,3635 4435,4130 ; CN1.30 4585,4580 4435,4430 4435,4130
  Top Layer w100: U1.3@4255,3555 U1.3@4355,3555
VOLT_SENSE: CN1.24 R3.1 R4.2 | length 3142.7
  Top Layer w10: R3.1@3976.85,4586.85 R3.1 R4.2 3831.97,4498.82 3756.18,4498.82 3726.85,4528.15 3726.85,4617.46 3744.53,4635.13 3744.53,4701.45 4150,5106.92 4150,5230 4185,5265 4560,5265 4585,5240 5380,5240 5419.53,5200.47 5419.53,5155.47 5475,5100 CN1.24
pads on no net: CN1.3 CN1.9 CN1.10 CN1.11 CN1.12 CN1.18 CN1.19 CN1.20 CN1.21 CN1.25 CN1.26 CN1.28 J1.3 J1.4 J1.5 J1.7 J1.11 J1.12 J1.13 J1.15 J1.16 J1.17 J1.18 J1.20 J1.22 J1.25 J1.26 J1.27 J1.28 J1.29 J1.30 J1.31 J1.32 J1.33 J1.34 J1.35 J1.36 J1.37 J1.38 J1.39 J1.40 J1.H J2.3 J2.7 J2.10 J2.11 J3.1 J3.8 U2.4 U2.7 U3.5 U4.7 U5.H U6.5 U6.6 U6.7 U6.8

## Text inside footprints (layer, text, board x,y; h text height)
CN1: Bottom Overlay "Nucleo-32" at 5945.87,4821.73 h100; Bottom Overlay "RST" at 6489.17,4959.53 h60 r90; Bottom Overlay "USB" at 4693.9,4943.78 h60 r90
D1: Top Overlay "+" at 5939.63,3103.66 h39.37 r270
D2: Top Overlay "+" at 5439.63,3103.66 h39.37 r270
D3: Top Overlay "+" at 4939.63,3103.66 h39.37 r270
D4: Top Overlay "+" at 4439.63,3103.66 h39.37 r270
D5: Top Overlay "+" at 4440,2810.24 h39.37 r90
D6: Top Overlay "+" at 4940,2810.24 h39.37 r90
D7: Top Overlay "+" at 5440,2814.29 h39.37 r90
D8: Top Overlay "+" at 5940,2820.24 h39.37 r90
J1: Top Overlay "39" at 3345,2765 h60; Top Overlay "1" at 3415,4665 h60; Top Overlay "(USB) PWR IN" at 1690,4690 h39.37; Top Overlay "Raspberry Pi 3 B" at 2165,3795 h60; Top Overlay "PLACE BOARD UNDERNEATH" at 1965,3660 h60
J2: Bottom Overlay "6" at 7229.06,4598.62 h59.06 r270; Bottom Overlay "9" at 7229.06,4925.79 h59.06 r270; Bottom Overlay "5" at 6858.98,4980.32 h59.06 r270; Bottom Overlay "1" at 6858.98,4553.94 h59.06 r270
J3: Bottom Overlay "Micro SD" at 5058.66,3855.87 h60
U1: Bottom Overlay "Buck conv." at 4103.03,4165.24 h60 r90; Bottom Overlay "IN-" at 3902.24,4188.86 h60 r90; Bottom Overlay "OUT-" at 3902.24,3838.46 h60 r90; Bottom Overlay "IN+" at 4335.31,4188.86 h60 r90; Bottom Overlay "OUT+" at 4335.31,3846.34 h60 r90
U2: Top Overlay "-" at 3012.24,5277.8 h60 r270; Top Overlay "+" at 3012.24,5159.69 h60 r270; Top Overlay "<NC>" at 2854.76,5269.92 h39.37 r270; Top Overlay "Out" at 2752.4,5104.57 h39.37 r270; Top Overlay "5V" at 2752.4,5356.54 h39.37 r270; Top Overlay "GND" at 2681.54,5250.24 h39.37 r270
U5: Top Overlay "LCD" at 4134.24,1563 h200
U6: Bottom Overlay "o" at 5514.92,3959.84 h60 r90